# Altium PCB v010 connector pcb.PcbDoc
Units mm, origin at the board's own origin, x right, y up, seen from the top; angles counter-clockwise.
Board outline 6.34 x 4.64 mm, 2 copper layers (Top Layer, Bottom Layer); 4 components, 5 nets, 17 pads, 5 vias.
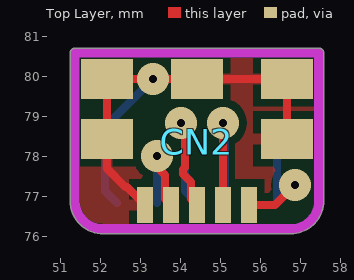
[diagram p0: Top Layer view]
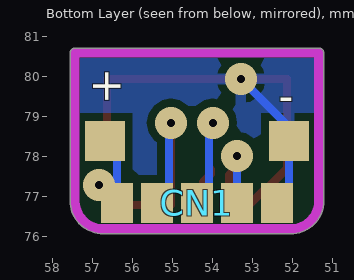
[diagram p1: Bottom Layer view, seen from below]

## Layer stack, top to bottom
Top Layer: signal copper 0.0356
Dielectric: prepreg 0.32, FR-4, Dk 4.8
Bottom Layer: signal copper 0.0356

## Board outline
51.23,76.85 51.23,80.6 cw(c51.35,80.6) 51.35,80.72 57.45,80.72 cw(c57.45,80.6) 57.57,80.6 57.57,76.9 ccw(c57.45,76.9) 57.57,76.901 57.57,76.9 cw(c56.75,76.9) 56.75,76.08 52.05,76.08 cw(c52.05,76.9) 51.234,76.819 cw(c51.35,76.85)

## Design rules (kind name [scope] priority, off if disabled: settings)
Clearance "Clearance edge of pcb" [(OnLayer('Keep-Out Layer'))] p1: gap=0
Clearance [All] p2: gap=0.2
Clearance Clearance_Via [(IsVia) vs (IsVia)] p3: gap=0.2
Clearance Polygon [InPoly vs IsPad] p4: gap=0.2
ComponentClearance [All] p1: gap=0.1 collisioncheckmode=3 verticalgap=0.1 showdistances=FALSE
FabricationTestPointUsage TestPointUsage [All] p1: valid=0 allowmultiple=FALSE
FabricationTestpoint Testpoint [All] p1: side=3 testpointundercomponent=TRUE minsize=1.016 maxsize=2.54 preferedsize=1.524 minholesize=0 maxholesize=1.016 preferedholesize=0.813 testpointgrid=0.025 allowsidetop=TRUE allowsidebottom=TRUE usegrid=TRUE gridtolerance=0
HoleSize [All] p1: absolutevalues=TRUE maxlimit=2.54 minlimit=0.04 maxpercent=80.000 minpercent=20.000
MinimumAnnularRing [All] p1: minimumring=0.3
PolygonConnect [All] p1: connectstyle=Relief reliefconductorwidth=0.254 reliefentries=4 polygonreliefangle="90 Angle"
RoomDefinition "v010 connector schematics" [InComponentClass('v010 connector schematics')] p1: confinementstyle=ConfineOut formatcopy=TRUE lockcomponents=FALSE outline 0,0 50.8,0 50.8,25.4 0,25.4
RoutingCorners [All] p1: cornerstyle=Round minsetback=1 maxsetback=1
RoutingVias [All] p1: holewidth=0.2 width=0.8 viastyle="Through Hole" minholewidth=0.2 minwidth=0.8 maxholewidth=0.2 maxwidth=0.8
SilkscreenOverComponentPads [All] p1: minsilkscreentomaskgap=0.254
SolderMaskExpansion SolderMaskExpansion_1 [IsVia] p1: expansion=-0.5
SolderMaskExpansion [All] p2: expansion=0.1
Width Width_1 [(InNet('GND') OR InNet('VCC'))] p1: maxlimit=0.2 minlimit=0.2 preferedwidth=0.2
Width [All] p2: maxlimit=0.2 minlimit=0.2 preferedwidth=0.2
22 further rules are at their usual default settings.

## Components (designator, comment, footprint, x,y, rotation, side; value= is the part's Value field where it differs from the comment)
+ "No component mounted" SU01LS#1 56.9,78.4 r180 bottom
- "No component mounted" SU01LS#2 51.9,78.4 r180 bottom
CN1 "5pin smd" "SU05LSR - 1MM" 56.4,76.85 r180 bottom
CN2 "Micro USB AB" "MICRO USB RECEPTACLE SMALLER" 58.4,75.8 r180 top

## Footprints (in the part's own frame and the unit in brackets; to place one, negate y for a bottom-side part, rotate by r counter-clockwise, add the part's x,y. Pads: shape width x height; smd on the part's side, far side on the other; paste and mask are expansions set on the pad)
"MICRO USB RECEPTACLE SMALLER" [mm] "Micro USB Receptacle (1981568-1-c - type b)"
  rect 0.4x0.9 smd: 1(2.7,-1) 2(3.35,-1) 3(4,-1) 4(4.65,-1) 5(5.3,-1)
  rect 1.3x1 smd paste+0 mask+0: 6(1.75,-4.15) 6(1.75,-2.65) 6(4,-4.15) 6(6.25,-2.65) 6(6.25,-4.15)
  body extent 0.01,-6.05 7.99,-0.5, height 2.77
SU01LS#1 [mm]
  rect 1x1 smd: 1(0.2,0)
SU01LS#2 [mm]
  rect 1x1 smd: 1(-0.2,0)
"SU05LSR - 1MM" [mm] "1.0 mm spacing"
  rect 0.8x1 smd paste+0 mask+0: 1(0,0) 2(1,0) 3(2,0) 4(3,0) 5(4,0)

## Part data
+ -: library part "1pin smd"
CN1: "No component mounted"
CN2: library part "micro usb", "Connector Receptacle Micro USB AB SMD Reverse Angle"

## Via types
v1: diameter 0.8, hole 0.2, Top Layer to Bottom Layer, 5 vias

## Nets (pads, with @x,y where several pads share a name; then routed paths per layer and width w, separated by ;. In a path a pad name is that pad's centre, name@x,y a point inside that pad or via, vN(x,y) a via of type N, cw(c..) or ccw(c..) an arc to the next point about the centre after c; other vN are vias at no path point)
GND: -.1 CN1.5 CN2.5 CN2.6 | length 12.9
  Top Layer w0.2: CN2.5 52.65,77.25 52.609,77.25 52.15,77.709 52.15,78.45 52.15,79.95 v1(53.3,79.95) 54.4,79.95 56.65,79.95 CN2.6@56.65,78.45
  Bottom Layer w0.2: -.1@52.1,78.45 52.1,77.15 CN1.5 ; -.1@52.15,78.8 v1(53.3,79.95)
PD2: CN1.4 CN2.4 | length 2.4
  Top Layer w0.2: v1@53.299,78.024 v1(53.4,78.024) ; v1@53.4,77.75 53.6,77.55 53.6,76.95 CN2.4
  Bottom Layer w0.2: CN1.4 v1(53.4,78.024)
RX: CN1.3 CN2.3 | length 4.4
  Top Layer w0.2: v1(54,78.85) 54.1,78.75 54.1,77.735 54.05,77.685 54.05,77.574 54.25,77.374 54.25,76.95 CN2.3
  Bottom Layer w0.2: v1(54,78.85) 54.1,78.75 54.1,77.15 CN1.3
TX: CN1.2 CN2.2 | length 3.8
  Top Layer w0.2: CN2.2 v1(55.05,78.85)
  Bottom Layer w0.2: v1(55.05,78.85) 55.1,78.8 CN1.2@55.1,77.1
VCC: +.1 CN1.1 CN2.1 | length 3.6
  Top Layer w0.2: CN2.1 56.35,76.8 v1(56.85,77.3)
  Bottom Layer w0.2: +.1@56.7,78.35 56.4,78.05 CN1.1 v1(56.85,77.3)

## Polygon pours and split planes (outlines as drawn)
GND on Bottom Layer "Bottom Layer-No Net" (solid, remove dead copper, pour order 1001): 51.1,80.765 51.1,76.1 57.537,76.1 57.55,76.135 57.55,80.8
GND on Top Layer "Bottom Layer-No Net" (solid, remove dead copper, pour order 1000): 51.113,80.7 51.113,76.183 51.1,76.15 51.113,76.183 57.6,76.183 57.6,80.7

## Keep-outs
Keep-Out Layer:
  lines w0.24: 51.35,76.85 51.35,80.6 57.45,80.6 57.45,76.9 cw(c56.75,76.9) 56.75,76.2 52.05,76.2 cw(c52.05,76.9) 51.35,76.9

## Dimensions
51.35,76.2 to 57.45,76.2 on Mechanical 1
51.35,76.2 to 51.35,80.6 on Mechanical 1